# EAGLE board Line Board (EAGLE 9.3.2)
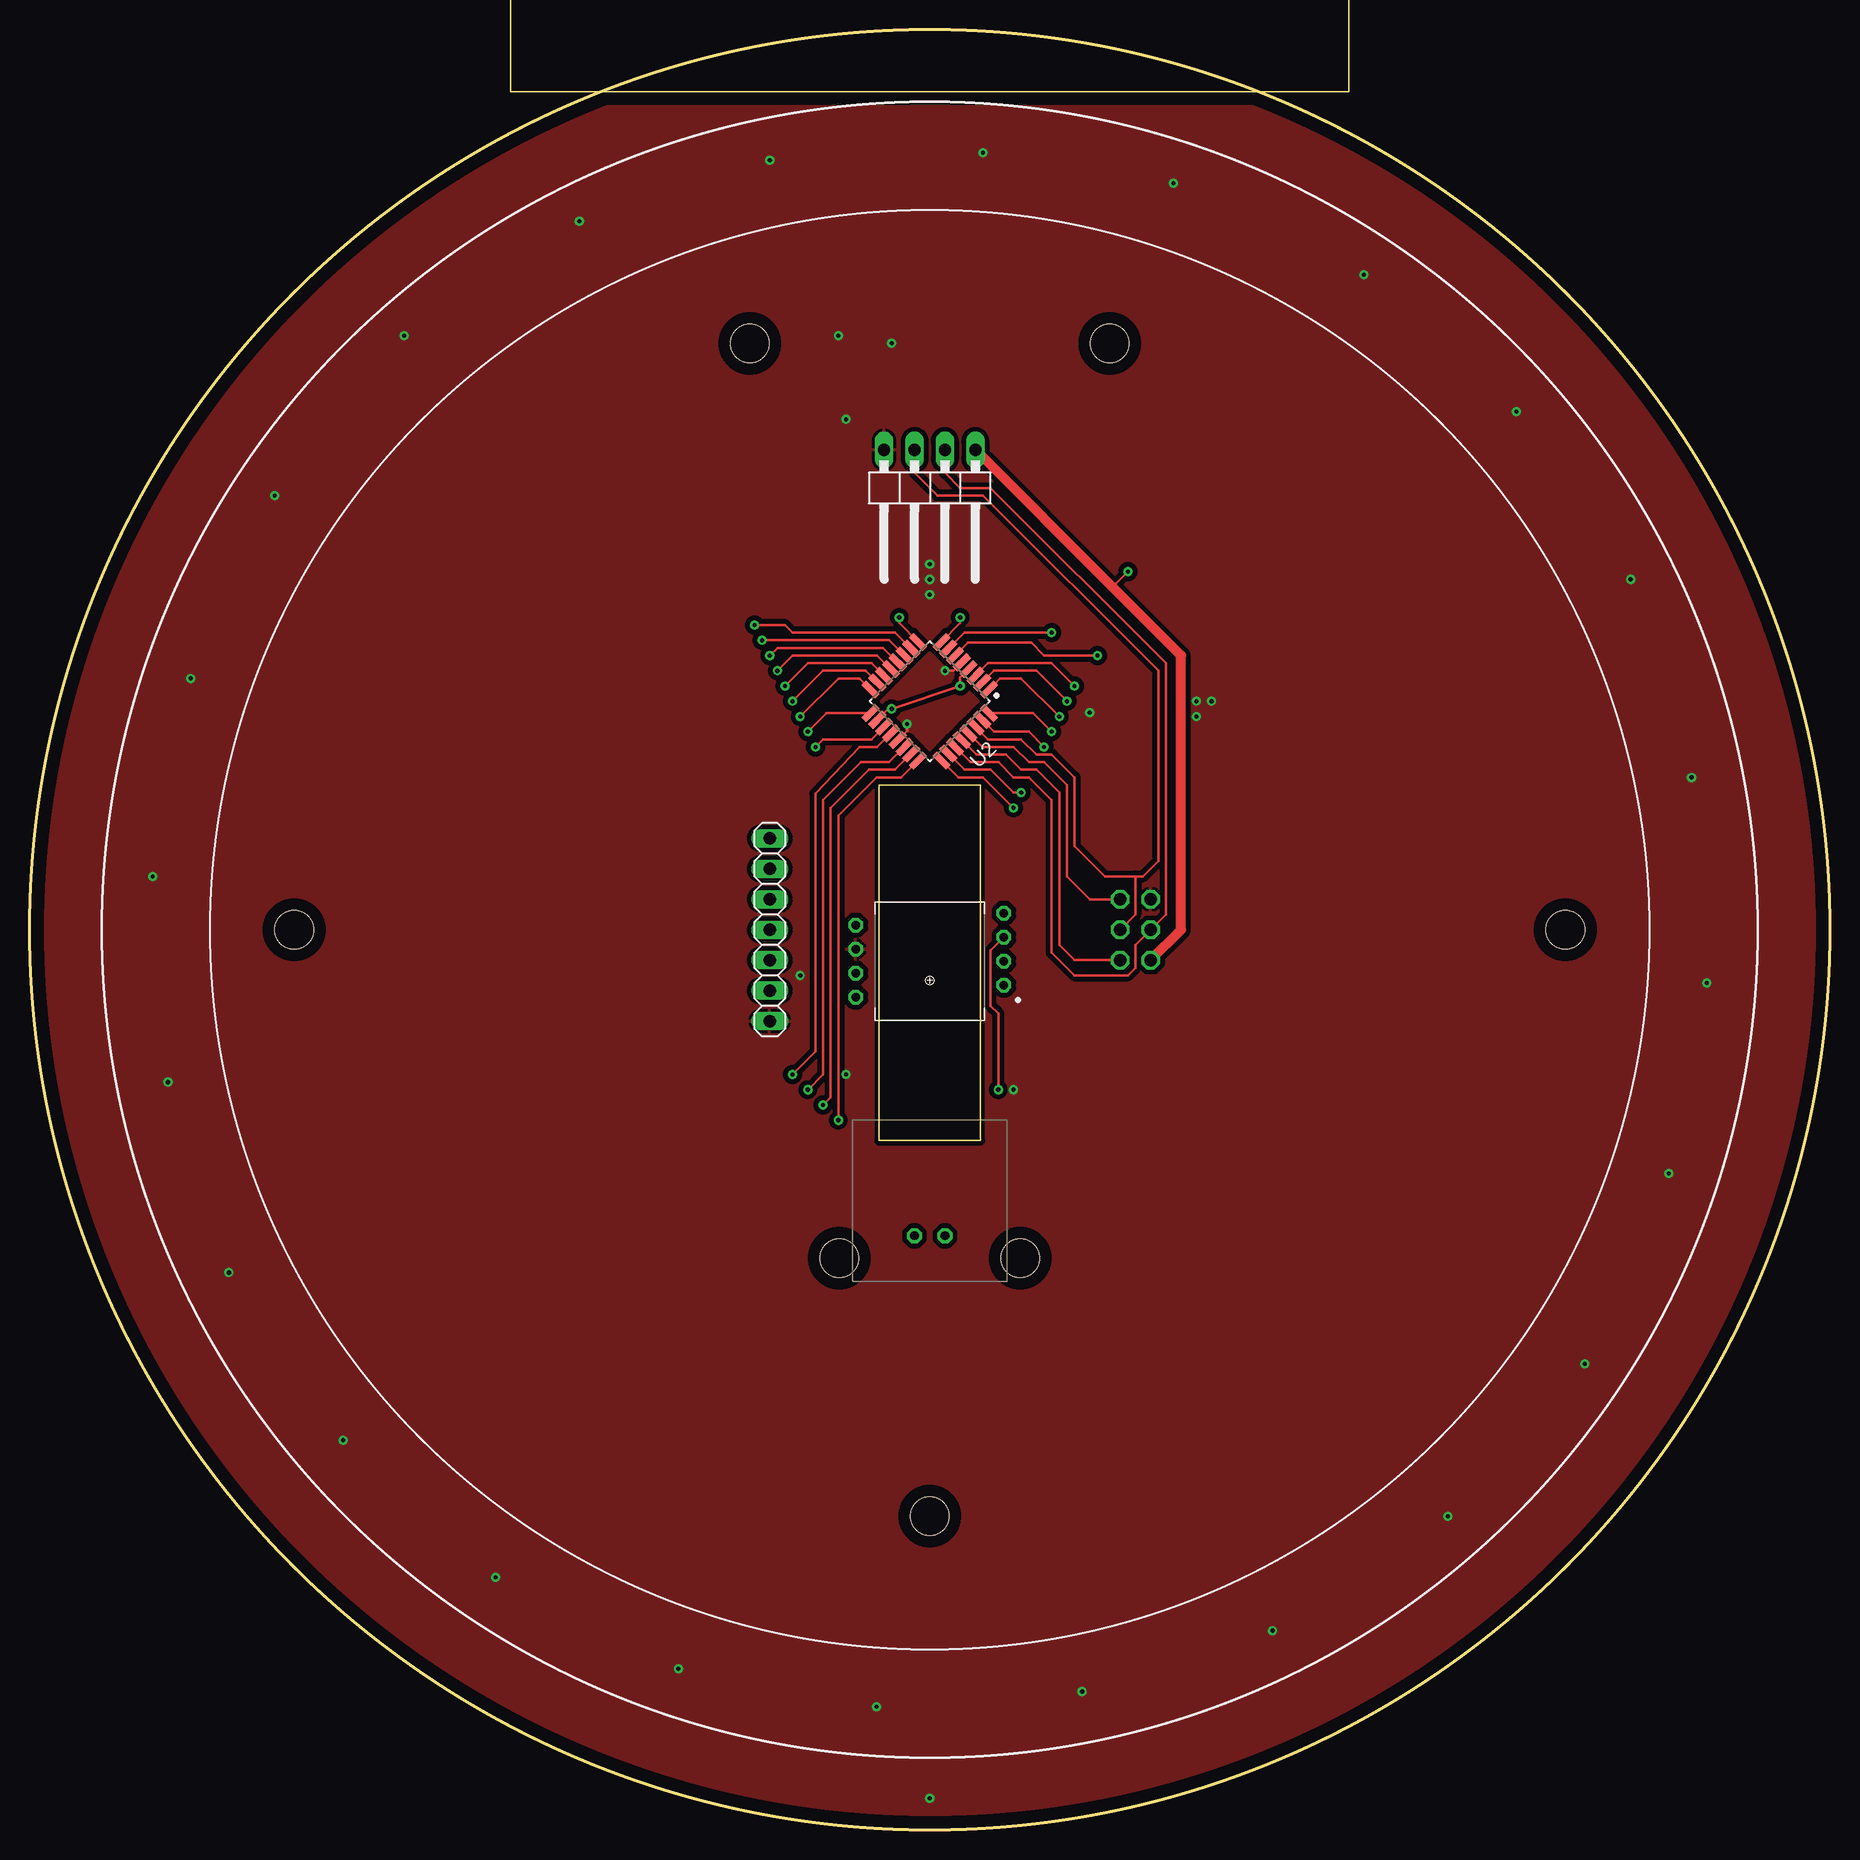
[diagram p0: board, top side]
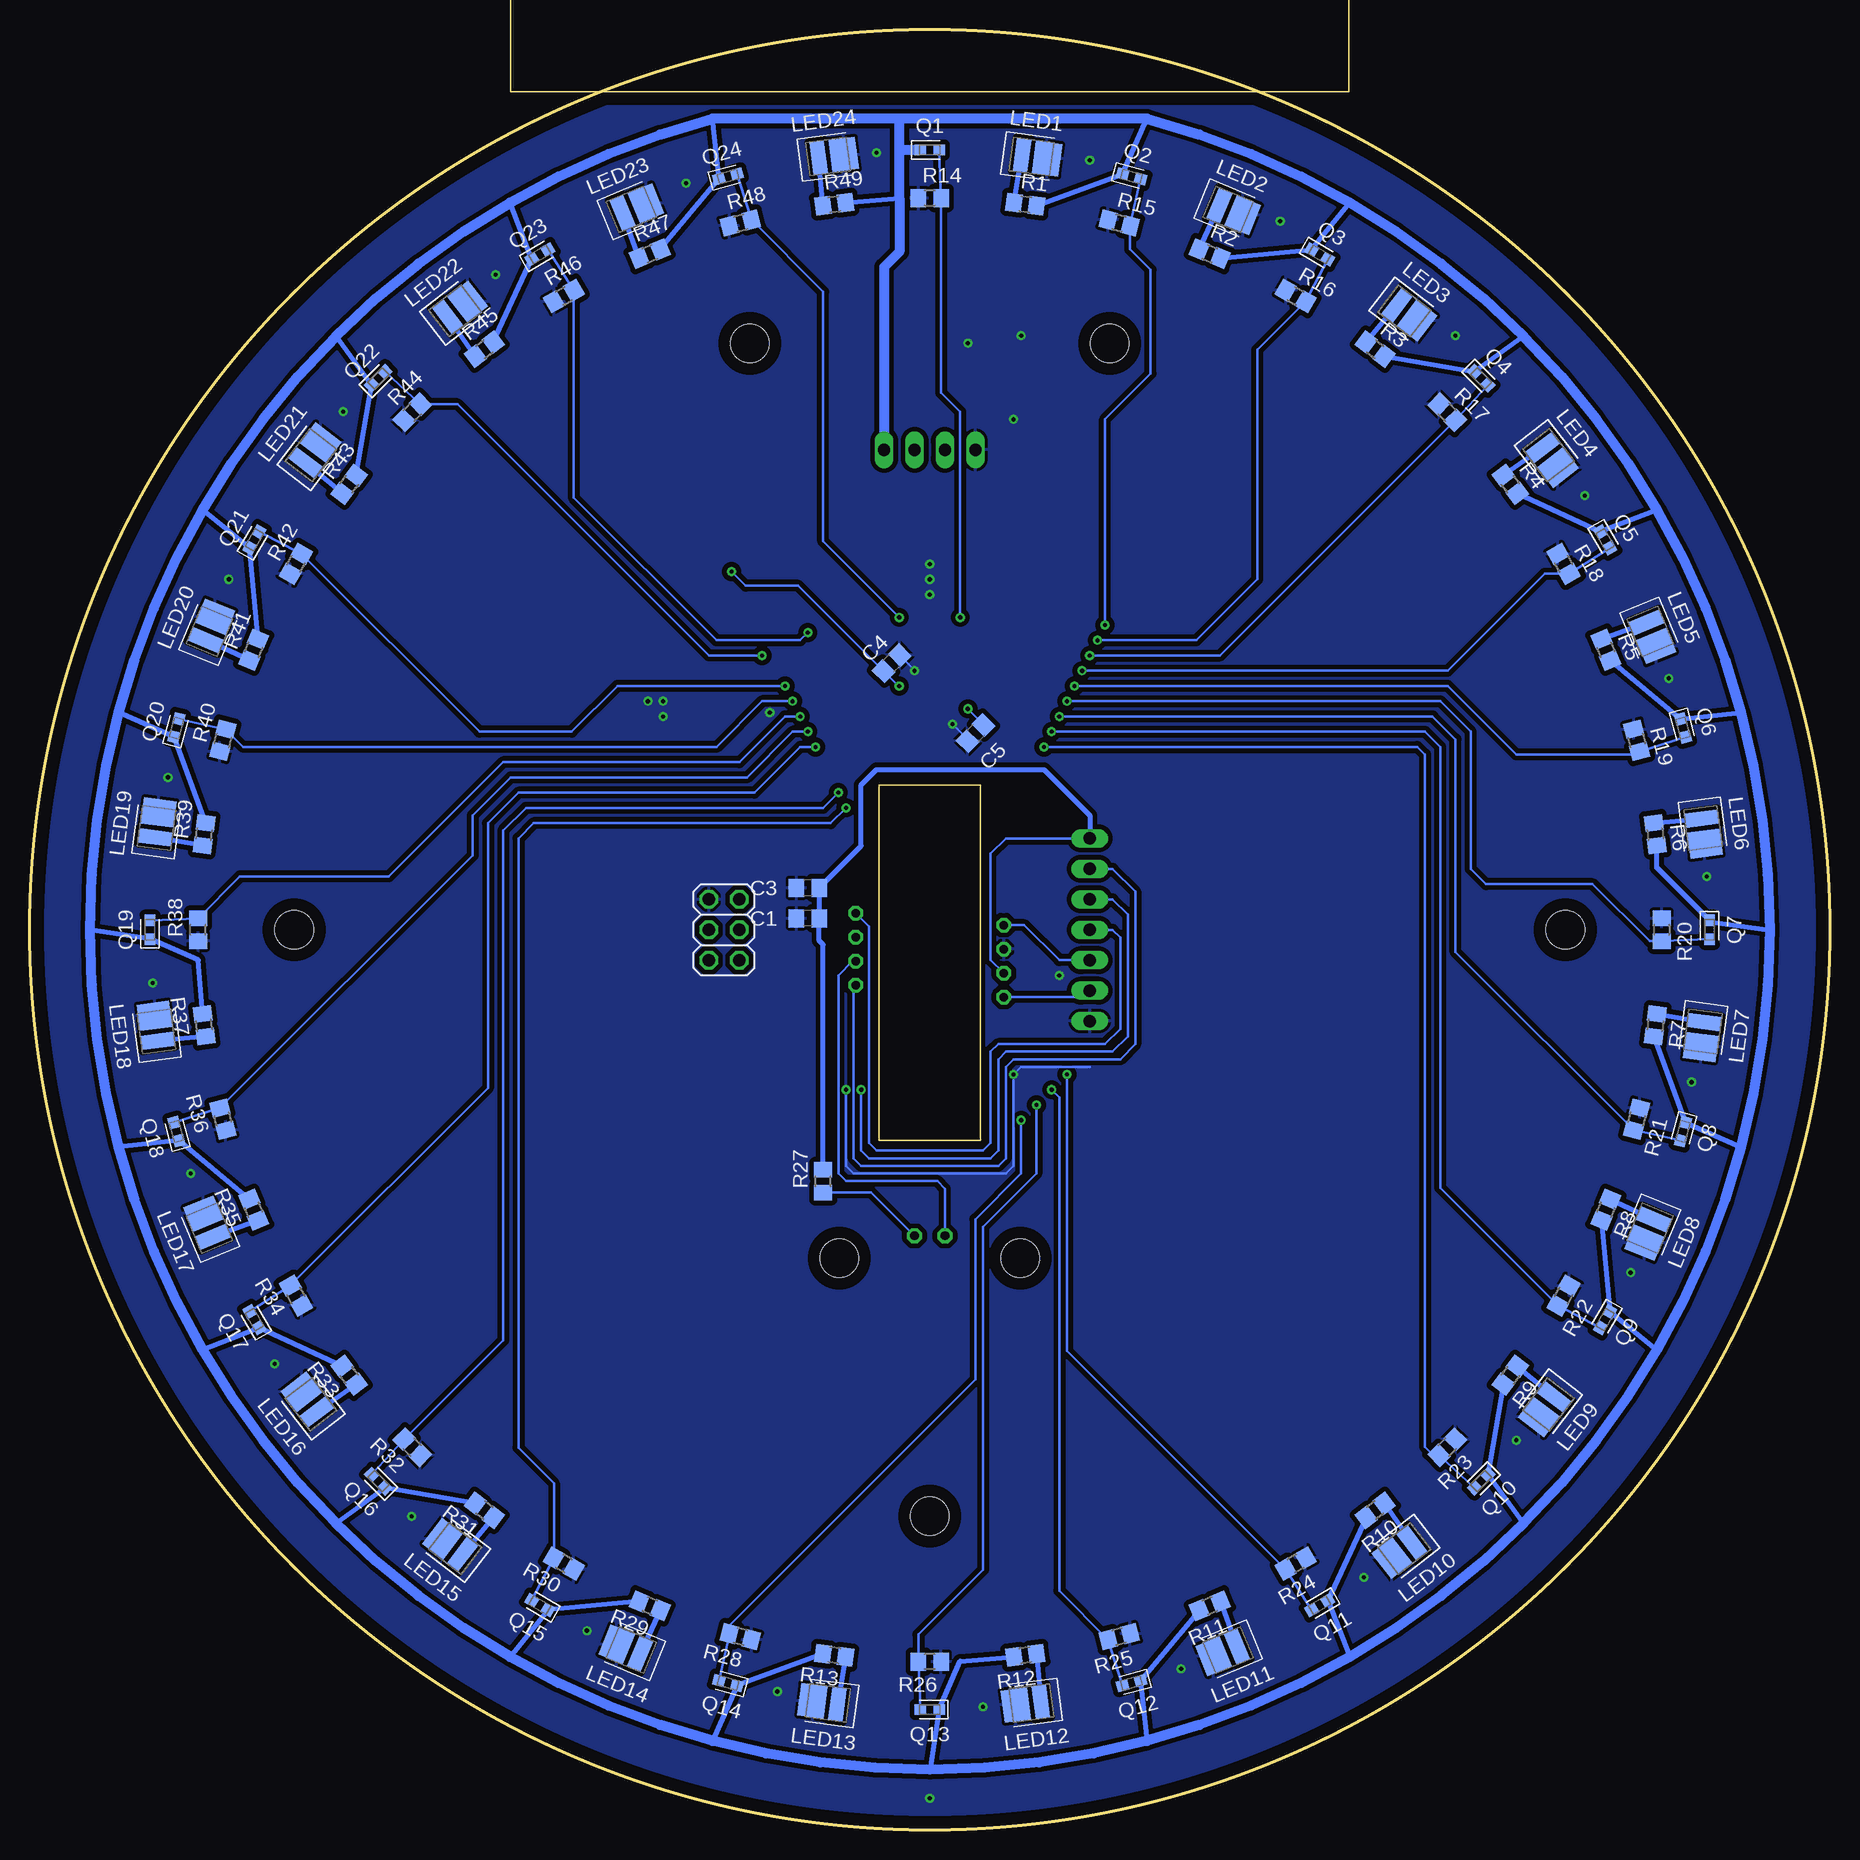
[diagram p1: board, bottom side, seen from below]

Size 150 x 150 mm. Coordinates in mm from the lower left corner, seen from the top.
Outline: circle at 75,75 radius 75
Copper layers (1*16): Top 0.035mm / dielectric 1.5mm / Bottom 0.035mm
Design rules "default *": minimum track width 8mil, minimum drill 0.35mm, track to track 6mil, track to pad 6mil, pad to pad 6mil, via to via 6mil, smd to smd 6mil, copper to edge 40mil, drill to drill 6mil, minimum pad ring 10mil, minimum via ring 8mil, stop-mask expansion 4mil, vias tented up to drill 15mil, thermal gap 10mil
Net classes: 0 default: width 0.203 mm
Holes 3.2 mm at 22.02,75 90,123.88 127.98,75 75,26.12 60,123.88

## Footprints (pad centres in the part's own frame; a part is rotated, then mirrored left to right if it is on the bottom)
C0805 = smd 1.3 x 1.5: 1 -0.95,0; 2 0.95,0
2X03 = drill 1.016 octagon: 1 -2.54,-1.27; 2 -2.54,1.27; 3 0,-1.27; 4 0,1.27; 5 2.54,-1.27; 6 2.54,1.27
1X04/90 = drill 1.016 long: 1 -3.81,-3.81; 2 -1.27,-3.81; 3 1.27,-3.81; 4 3.81,-3.81
1X07 = drill 1.016 long: 1 -7.62,0; 2 -5.08,0; 3 -2.54,0; 4 0,0; 5 2.54,0; 6 5.08,0; 7 7.62,0
LEDC3428X70 = smd 1.2 x 2.7: 1 -0.785,0 | smd 2.2 x 2.7: 2 1.315,0
LEDC1708X60 = smd 0.962 x 0.912: C -0.775,0; E 0.775,0
R0805 = smd 1.3 x 1.5: 1 -0.95,0; 2 0.95,0
QFP80P900X900X120-32 = smd 1.6 x 0.547: 1 -4.181,2.8; 2 -4.181,2; 3 -4.181,1.2; 4 -4.181,0.4; 5 -4.181,-0.4; 6 -4.181,-1.2; 7 -4.181,-2; 8 -4.181,-2.8; 17 4.181,-2.8; 18 4.181,-2; 19 4.181,-1.2; 20 4.181,-0.4; 21 4.181,0.4; 22 4.181,1.2; 23 4.181,2; 24 4.181,2.8 | smd 0.547 x 1.6: 9 -2.8,-4.181; 10 -2,-4.181; 11 -1.2,-4.181; 12 -0.4,-4.181; 13 0.4,-4.181; 14 1.2,-4.181; 15 2,-4.181; 16 2.8,-4.181; 25 2.8,4.181; 26 2,4.181; 27 1.2,4.181; 28 0.4,4.181; 29 -0.4,4.181; 30 -1.2,4.181; 31 -2,4.181; 32 -2.8,4.181
ADNS3050 = drill 0.711 octagon: 1 6.172,-3.25; 2 6.172,-1.25; 3 6.172,0.75; 4 6.172,2.75; 5 -6.172,1.75; 6 -6.172,-0.25; 7 -6.172,-2.25; 8 -6.172,-4.25; A 1.27,-24.15; K -1.27,-24.15 | hole 3.2: -7.544,-26.01; 7.544,-26.01

## Placement (x,y rotation side)
C1  0.1uF  [C0805]  85.16,75.95 180 bottom
C3  1uF  [C0805]  85.16,78.49 180 bottom
C4  0.1uF  [C0805]  78.17,97.22 45 bottom
C5  0.1uF  [C0805]  71.19,91.38 225 bottom
JP1  [2X03]  92.14,75 90 bottom
JP2  [1X04/90]  75,111.19 180 top
JP4  [1X07]  61.66,75 270 top
LED1  STW8A12D_LED  [LEDC3428X70]  66.52,139.44 352.5 bottom
LED2  STW8A12D_LED  [LEDC3428X70]  50.13,135.05 337.5 bottom
LED3  STW8A12D_LED  [LEDC3428X70]  35.43,126.57 322.5 bottom
LED4  STW8A12D_LED  [LEDC3428X70]  23.43,114.57 307.5 bottom
LED5  STW8A12D_LED  [LEDC3428X70]  14.95,99.87 292.5 bottom
LED6  STW8A12D_LED  [LEDC3428X70]  10.56,83.48 277.5 bottom
LED7  STW8A12D_LED  [LEDC3428X70]  10.56,66.52 262.5 bottom
LED8  STW8A12D_LED  [LEDC3428X70]  14.95,50.13 247.5 bottom
LED9  STW8A12D_LED  [LEDC3428X70]  23.43,35.43 232.5 bottom
LED10  STW8A12D_LED  [LEDC3428X70]  35.43,23.43 217.5 bottom
LED11  STW8A12D_LED  [LEDC3428X70]  50.13,14.95 202.5 bottom
LED12  STW8A12D_LED  [LEDC3428X70]  66.52,10.56 187.5 bottom
LED13  STW8A12D_LED  [LEDC3428X70]  83.48,10.56 172.5 bottom
LED14  STW8A12D_LED  [LEDC3428X70]  99.87,14.95 157.5 bottom
LED15  STW8A12D_LED  [LEDC3428X70]  114.57,23.43 142.5 bottom
LED16  STW8A12D_LED  [LEDC3428X70]  126.57,35.43 127.5 bottom
LED17  STW8A12D_LED  [LEDC3428X70]  135.05,50.13 112.5 bottom
LED18  STW8A12D_LED  [LEDC3428X70]  139.44,66.52 97.5 bottom
LED19  STW8A12D_LED  [LEDC3428X70]  139.44,83.48 82.5 bottom
LED20  STW8A12D_LED  [LEDC3428X70]  135.05,99.87 67.5 bottom
LED21  STW8A12D_LED  [LEDC3428X70]  126.57,114.57 52.5 bottom
LED22  STW8A12D_LED  [LEDC3428X70]  114.57,126.57 37.5 bottom
LED23  STW8A12D_LED  [LEDC3428X70]  99.87,135.05 22.5 bottom
LED24  STW8A12D_LED  [LEDC3428X70]  83.48,139.44 7.5 bottom
Q1  ALS-PT19-315C/L177/TR8  [LEDC1708X60]  75,140 0 bottom
Q2  ALS-PT19-315C/L177/TR8  [LEDC1708X60]  58.18,137.78 345 bottom
Q3  ALS-PT19-315C/L177/TR8  [LEDC1708X60]  42.5,131.29 330 bottom
Q4  ALS-PT19-315C/L177/TR8  [LEDC1708X60]  29.04,120.96 315 bottom
Q5  ALS-PT19-315C/L177/TR8  [LEDC1708X60]  18.71,107.5 300 bottom
Q6  ALS-PT19-315C/L177/TR8  [LEDC1708X60]  12.22,91.82 285 bottom
Q7  ALS-PT19-315C/L177/TR8  [LEDC1708X60]  10,75 270 bottom
Q8  ALS-PT19-315C/L177/TR8  [LEDC1708X60]  12.22,58.18 255 bottom
Q9  ALS-PT19-315C/L177/TR8  [LEDC1708X60]  18.71,42.5 240 bottom
Q10  ALS-PT19-315C/L177/TR8  [LEDC1708X60]  29.04,29.04 225 bottom
Q11  ALS-PT19-315C/L177/TR8  [LEDC1708X60]  42.5,18.71 210 bottom
Q12  ALS-PT19-315C/L177/TR8  [LEDC1708X60]  58.18,12.22 195 bottom
Q13  ALS-PT19-315C/L177/TR8  [LEDC1708X60]  75,10 180 bottom
Q14  ALS-PT19-315C/L177/TR8  [LEDC1708X60]  91.82,12.22 165 bottom
Q15  ALS-PT19-315C/L177/TR8  [LEDC1708X60]  107.5,18.71 150 bottom
Q16  ALS-PT19-315C/L177/TR8  [LEDC1708X60]  120.96,29.04 135 bottom
Q17  ALS-PT19-315C/L177/TR8  [LEDC1708X60]  131.29,42.5 120 bottom
Q18  ALS-PT19-315C/L177/TR8  [LEDC1708X60]  137.78,58.18 105 bottom
Q19  ALS-PT19-315C/L177/TR8  [LEDC1708X60]  140,75 90 bottom
Q20  ALS-PT19-315C/L177/TR8  [LEDC1708X60]  137.78,91.82 75 bottom
Q21  ALS-PT19-315C/L177/TR8  [LEDC1708X60]  131.29,107.5 60 bottom
Q22  ALS-PT19-315C/L177/TR8  [LEDC1708X60]  120.96,120.96 45 bottom
Q23  ALS-PT19-315C/L177/TR8  [LEDC1708X60]  107.5,131.29 30 bottom
Q24  ALS-PT19-315C/L177/TR8  [LEDC1708X60]  91.82,137.78 15 bottom
R1  390R  [R0805]  67.04,135.48 352.5 bottom
R2  390R  [R0805]  51.66,131.36 337.5 bottom
R3  390R  [R0805]  37.87,123.4 322.5 bottom
R4  390R  [R0805]  26.6,112.13 307.5 bottom
R5  390R  [R0805]  18.64,98.34 292.5 bottom
R6  390R  [R0805]  14.52,82.96 277.5 bottom
R7  390R  [R0805]  14.52,67.04 262.5 bottom
R8  390R  [R0805]  18.64,51.66 247.5 bottom
R9  390R  [R0805]  26.6,37.87 232.5 bottom
R10  390R  [R0805]  37.87,26.6 217.5 bottom
R11  390R  [R0805]  51.66,18.64 202.5 bottom
R12  390R  [R0805]  67.04,14.52 187.5 bottom
R13  390R  [R0805]  82.96,14.52 172.5 bottom
R14  10k  [R0805]  75,136 0 bottom
R15  10k  [R0805]  59.21,133.92 345 bottom
R16  10k  [R0805]  44.5,127.83 330 bottom
R17  10k  [R0805]  31.87,118.13 315 bottom
R18  10k  [R0805]  22.17,105.5 300 bottom
R19  10k  [R0805]  16.08,90.79 285 bottom
R20  10k  [R0805]  14,75 270 bottom
R21  10k  [R0805]  16.08,59.21 255 bottom
R22  10k  [R0805]  22.17,44.5 240 bottom
R23  10k  [R0805]  31.87,31.87 225 bottom
R24  10k  [R0805]  44.5,22.17 210 bottom
R25  10k  [R0805]  59.21,16.08 195 bottom
R26  10k  [R0805]  75,14 180 bottom
R27  33R  [R0805]  83.89,54.05 90 bottom
R28  10k  [R0805]  90.79,16.08 165 bottom
R29  390R  [R0805]  98.34,18.64 157.5 bottom
R30  10k  [R0805]  105.5,22.17 150 bottom
R31  390R  [R0805]  112.13,26.6 142.5 bottom
R32  10k  [R0805]  118.13,31.87 135 bottom
R33  390R  [R0805]  123.4,37.87 127.5 bottom
R34  10k  [R0805]  127.83,44.5 120 bottom
R35  390R  [R0805]  131.36,51.66 112.5 bottom
R36  10k  [R0805]  133.92,59.21 105 bottom
R37  390R  [R0805]  135.48,67.04 97.5 bottom
R38  10k  [R0805]  136,75 90 bottom
R39  390R  [R0805]  135.48,82.96 82.5 bottom
R40  10k  [R0805]  133.92,90.79 75 bottom
R41  390R  [R0805]  131.36,98.34 67.5 bottom
R42  10k  [R0805]  127.83,105.5 60 bottom
R43  390R  [R0805]  123.4,112.13 52.5 bottom
R44  10k  [R0805]  118.13,118.13 45 bottom
R45  390R  [R0805]  112.13,123.4 37.5 bottom
R46  10k  [R0805]  105.5,127.83 30 bottom
R47  390R  [R0805]  98.34,131.36 22.5 bottom
R48  10k  [R0805]  90.79,133.92 15 bottom
R49  390R  [R0805]  82.96,135.48 7.5 bottom
U2  ATTINY828  [QFP80P900X900X120-32]  75,94.05 225 top
U3  ADNS3050  [ADNS3050]  75,73.63 0 top
U$1  [COLORBOARDCUTOUT]  75,75 0 top

## Library data of the parts
C1 C3-C5 = rcl; SPICEPREFIX: C
JP1 JP2 JP4 = pinhead
LED1-LED24 Q1-Q24 U2 U3 U$1 = Robocup2019
R1-R49 = rcl; SPICEPREFIX: R

## Nets
+3V3: C1.1 C3.1 JP4.1 R27.2 U3.7
+5V: C4.1 C5.1 JP1.2 JP2.1 Q1.C Q2.C Q3.C Q4.C Q5.C Q6.C Q7.C Q8.C Q9.C Q10.C Q11.C Q12.C Q13.C Q14.C Q15.C Q16.C Q17.C Q18.C Q19.C Q20.C Q21.C Q22.C Q23.C Q24.C R1.2 R2.2 R3.2 R4.2 R5.2 R6.2 R7.2 R8.2 R9.2 R10.2 R11.2 R12.2 R13.2 R29.2 R31.2 R33.2 R35.2 R37.2 R39.2 R41.2 R43.2 R45.2 R47.2 R49.2 U2.4 U2.18
COLORSENSOR1: Q1.E R14.2 U2.9
COLORSENSOR2: Q2.E R15.2 U2.10
COLORSENSOR3: Q3.E R16.2 U2.11
COLORSENSOR4: Q4.E R17.2 U2.12
COLORSENSOR5: Q5.E R18.2 U2.13
COLORSENSOR6: Q6.E R19.2 U2.14
COLORSENSOR7: Q7.E R20.2 U2.15
COLORSENSOR8: Q8.E R21.2 U2.16
COLORSENSOR9: Q9.E R22.2 U2.17
COLORSENSOR10: Q10.E R23.2 U2.19
COLORSENSOR11: Q11.E R24.2 U2.20
COLORSENSOR12: Q12.E R25.2 U2.22
COLORSENSOR13: Q13.E R26.2 U2.23
COLORSENSOR14: Q14.E R28.2 U2.24
COLORSENSOR15: Q15.E R30.2 U2.25
COLORSENSOR16: Q16.E R32.2 U2.26
COLORSENSOR17: Q17.E R34.2 U2.31
COLORSENSOR18: Q18.E R36.2 U2.32
COLORSENSOR19: Q19.E R38.2 U2.1
COLORSENSOR20: Q20.E R40.2 U2.2
COLORSENSOR21: Q21.E R42.2 U2.3
COLORSENSOR22: Q22.E R44.2 U2.6
COLORSENSOR23: Q23.E R46.2 U2.7
COLORSENSOR24: Q24.E R48.2 U2.8
GND: C1.2 C3.2 C4.2 C5.2 JP1.6 JP2.4 JP4.7 LED1.2 LED2.2 LED3.2 LED4.2 LED5.2 LED6.2 LED7.2 LED8.2 LED9.2 LED10.2 LED11.2 LED12.2 LED13.2 LED14.2 LED15.2 LED16.2 LED17.2 LED18.2 LED19.2 LED20.2 LED21.2 LED22.2 LED23.2 LED24.2 R14.1 R15.1 R16.1 R17.1 R18.1 R19.1 R20.1 R21.1 R22.1 R23.1 R24.1 R25.1 R26.1 R28.1 R30.1 R32.1 R34.1 R36.1 R38.1 R40.1 R42.1 R44.1 R46.1 R48.1 U2.5 U2.21 U3.6
MISO: JP1.1 U2.28
MOSI/SDA: JP1.4 JP2.2 U2.27
MOUSECS: JP4.4 U3.4
MOUSEMISO: JP4.2 U3.1
MOUSEMOSI: JP4.3 U3.3
MOUSEMOTION: JP4.6 U3.8
MOUSESCK: JP4.5 U3.5
N$1: LED1.1 R1.1
N$2: U3.2 U3.K
N$3: R27.1 U3.A
N$6: LED2.1 R2.1
N$8: LED3.1 R3.1
N$9: LED4.1 R4.1
N$10: LED5.1 R5.1
N$11: LED6.1 R6.1
N$12: LED7.1 R7.1
N$13: LED8.1 R8.1
N$14: LED9.1 R9.1
N$15: LED10.1 R10.1
N$16: LED11.1 R11.1
N$17: LED12.1 R12.1
N$18: LED13.1 R13.1
N$19: LED14.1 R29.1
N$20: LED15.1 R31.1
N$21: LED16.1 R33.1
N$22: LED17.1 R35.1
N$23: LED18.1 R37.1
N$24: LED19.1 R39.1
N$25: LED20.1 R41.1
N$26: LED21.1 R43.1
N$27: LED22.1 R45.1
N$28: LED23.1 R47.1
N$29: LED24.1 R49.1
RST: JP1.5 U2.29
SCK/SCL: JP1.3 JP2.3 U2.30

## Tracks (layer width: path | path; a pad name or v marks a point on that pad's centre or on a via)
+3V3
  Bottom 0.203: U3.7 69.92,72.47 69.92,81.35 68.65,82.62 JP4.1
  Bottom 0.406: R27.2 83.89,73.77 84.21,74.08 C1.1 C3.1 80.72,81.99 80.72,87.06 79.44,88.34 65.47,88.34 61.66,84.53 JP4.1
+5V  (via drill 0.35)
  Top 0.203: U2.4 77.54,96.02 v77.54,95.32 v71.83,93.41 71.54,93.41 U2.18 | v91.51,104.84 90.24,103.58
  Top 0.813: JP1.2 95.95,75 95.95,97.86 90.24,103.58 JP2.1
  Bottom 0.203: v77.54,95.32 77.61,95.32 C4.1 85.97,103.68 90.35,103.68 v91.51,104.84 | v71.83,93.41 70.52,92.11 C5.1
  Bottom 0.406: R12.2 72.46,14.04 Q13.C 75,5 | R37.2 135.96,72.46 Q19.C 145,75 | R49.2 77.54,135.96 | R1.2 Q2.C 56.88,142.62 | R2.2 Q3.C 40,135.62 | R3.2 Q4.C 25.5,124.5 | R4.2 Q5.C 14.38,110 | R5.2 Q6.C 7.39,93.12 | R7.2 Q8.C 7.39,56.88 | R8.2 Q9.C 14.38,40 | R9.2 Q10.C 25.5,25.5 | R10.2 Q11.C 40,14.38 | R11.2 Q12.C 56.88,7.39 | R13.2 Q14.C 93.12,7.39 | R29.2 Q15.C 110,14.38 | R31.2 Q16.C 124.5,25.5 | R33.2 Q17.C 135.62,40 | R35.2 Q18.C 142.62,56.88 | R39.2 Q20.C 142.62,93.12 | R41.2 Q21.C 135.62,110 | R43.2 Q22.C 124.5,124.5 | R45.2 Q23.C 110,135.62 | R47.2 Q24.C 93.12,142.62 | R6.2 14.4,80.17 Q7.C 9.86,75.64 5,75
  Bottom 0.813: 77.54,142.62 56.88,142.62 arc15 40,135.62 arc15 25.5,124.5 arc15 14.38,110 arc15 7.39,93.12 arc15 5,75 arc15 7.39,56.88 arc15 14.38,40 arc15 25.5,25.5 arc15 40,14.38 arc15 56.88,7.39 arc15 75,5 arc15 93.12,7.39 arc15 110,14.38 arc15 124.5,25.5 arc15 135.62,40 arc15 142.62,56.88 arc15 145,75 arc15 142.62,93.12 arc15 135.62,110 arc15 124.5,124.5 arc15 110,135.62 arc15 93.12,142.62 77.54,142.62 | 77.54,139.77 77.54,135.96 77.54,131.51 78.81,130.25 JP2.1 | 77.54,139.77 77.54,142.62 | Q1.C 77.31,140 77.54,139.77
COLORSENSOR1  (via drill 0.35)
  Top 0.203: v72.46,101.03 72.46,100.55 U2.9
  Bottom 0.203: Q1.E R14.2 74.05,119.77 72.46,118.18 v72.46,101.03
COLORSENSOR2  (via drill 0.35)
  Top 0.203: U2.10 72.11,99.77 63.57,99.77 62.94,100.4 v60.39,100.4
  Bottom 0.203: Q2.E R15.2 58.29,131.71 56.59,130 56.59,121.35 60.39,117.55 v60.39,100.4
COLORSENSOR3  (via drill 0.35)
  Top 0.203: U2.11 71.62,99.13 v61.03,99.13
  Bottom 0.203: Q3.E R16.2 47.7,123.34 47.7,104.21 52.77,99.13 v61.03,99.13
COLORSENSOR4  (via drill 0.35)
  Top 0.203: U2.12 71.12,98.5 63.57,98.5 62.3,98.5 v61.66,97.86
  Bottom 0.203: Q4.E R17.2 50.8,97.86 v61.66,97.86
COLORSENSOR5  (via drill 0.35)
  Top 0.203: U2.13 70.62,97.86 63.57,97.86 v62.3,96.59
  Bottom 0.203: Q5.E R18.2 23.73,104.68 31.82,96.59 v62.3,96.59
COLORSENSOR6  (via drill 0.35)
  Top 0.203: U2.14 70.13,97.22 64.84,97.22 v62.94,95.32
  Bottom 0.203: Q6.E R19.2 16.1,89.61 26.1,89.61 31.82,95.32 v62.94,95.32
COLORSENSOR7  (via drill 0.35)
  Top 0.203: U2.15 69.63,96.59 66.11,96.59 v63.57,94.05
  Bottom 0.203: Q7.E R20.2 14.99,74.05 19.76,78.81 28.65,78.81 29.91,80.08 29.91,91.51 32.45,94.05 v63.57,94.05
COLORSENSOR8  (via drill 0.35)
  Top 0.203: U2.16 69.14,95.95 67.38,95.95 v64.2,92.78
  Bottom 0.203: Q8.E R21.2 31.19,73.15 31.19,90.88 33.09,92.78 v64.2,92.78
COLORSENSOR9  (via drill 0.35)
  Top 0.203: U2.17 66.4,93.07 v64.84,91.51
  Bottom 0.203: Q9.E R22.2 32.45,53.48 32.45,90.24 33.73,91.51 v64.84,91.51
COLORSENSOR10  (via drill 0.35)
  Top 0.203: v65.47,90.24 66.11,90.88 70.13,90.88 U2.19
  Bottom 0.203: Q10.E R23.2 33.01,31.19 33.73,31.91 33.73,89.61 34.36,90.24 v65.47,90.24
COLORSENSOR11  (via drill 0.35)
  Top 0.203: U2.20 70.62,90.24 69.14,90.24 65.47,86.35 65.47,64.84 v63.57,62.94
  Bottom 0.203: R24.2 45.26,21.59 | 45.26,21.59 Q11.E | v63.57,62.94 63.57,39.91 45.26,21.59
COLORSENSOR12  (via drill 0.35)
  Top 0.203: U2.22 71.62,88.97 69.28,88.97 66.11,85.8 66.11,62.94 v64.84,61.66
  Bottom 0.203: Q12.E R25.2 64.2,19.91 64.2,61.03 v64.84,61.66
COLORSENSOR13  (via drill 0.35)
  Top 0.203: U2.23 72.11,88.34 69.92,88.34 66.75,85.16 66.75,61.03 v66.11,60.39
  Bottom 0.203: Q13.E R26.2 75.95,16.27 70.56,21.66 70.56,50.23 66.11,54.68 v66.11,60.39
COLORSENSOR14  (via drill 0.35)
  Top 0.203: U2.24 72.61,87.7 70.56,87.7 67.38,84.53 v67.38,59.12
  Bottom 0.203: v67.38,59.12 67.38,54.68 71.19,50.87 71.19,37.53 91.71,17.02 R28.2 Q14.E
COLORSENSOR15  (via drill 0.35)
  Top 0.203: U2.25 77.39,87.7 79.44,87.7 v81.98,85.16
  Bottom 0.203: Q15.E R30.2 106.32,28.85 109.29,31.82 109.29,82.62 108.02,83.89 83.25,83.89 v81.98,85.16
COLORSENSOR16  (via drill 0.35)
  Top 0.203: U2.26 77.89,88.34 80.08,88.34 81.98,86.43 v82.62,86.43
  Bottom 0.203: Q16.E R32.2 110.56,40.78 110.56,83.25 108.66,85.16 108.02,85.16 83.89,85.16 v82.62,86.43
COLORSENSOR17  (via drill 0.35)
  Top 0.203: U2.31 80.37,91.51 83.25,91.51 v84.53,90.24
  Bottom 0.203: Q17.E 128.41,45.26 | 128.41,45.26 R34.2 | v84.53,90.24 85.8,90.24 89.61,86.43 109.29,86.43 111.83,83.89 111.83,61.83 128.41,45.26
COLORSENSOR18  (via drill 0.35)
  Top 0.203: v85.16,91.51 83.6,93.07 U2.32
  Bottom 0.203: Q18.E R36.2 113.1,81.2 113.1,84.53 109.92,87.7 90.24,87.7 86.43,91.51 v85.16,91.51
COLORSENSOR19  (via drill 0.35)
  Top 0.203: U2.1 80.86,95.95 82.62,95.95 v85.8,92.78
  Bottom 0.203: Q19.E R38.2 132.5,79.44 120.09,79.44 110.56,88.97 90.88,88.97 87.06,92.78 v85.8,92.78
COLORSENSOR20  (via drill 0.35)
  Top 0.203: U2.2 80.37,96.59 83.89,96.59 v86.43,94.05
  Bottom 0.203: Q20.E R40.2 132.21,90.24 92.78,90.24 88.97,94.05 v86.43,94.05
COLORSENSOR21  (via drill 0.35)
  Top 0.203: U2.3 79.87,97.22 85.16,97.22 v87.06,95.32
  Bottom 0.203: Q21.E R42.2 112.54,91.51 104.84,91.51 101.03,95.32 v87.06,95.32
COLORSENSOR22  (via drill 0.35)
  Top 0.203: U2.6 78.17,98.92 83.46,98.92 84.53,97.86 v88.97,97.86
  Bottom 0.203: Q22.E R44.2 114.36,118.81 93.41,97.86 v88.97,97.86
COLORSENSOR23  (via drill 0.35)
  Top 0.203: v85.16,99.77 77.89,99.77 U2.7
  Bottom 0.203: Q23.E R46.2 104.68,111.03 92.78,99.13 85.8,99.13 v85.16,99.77
COLORSENSOR24  (via drill 0.35)
  Top 0.203: U2.8 77.54,100.55 v77.54,101.03
  Bottom 0.203: Q24.E R48.2 83.89,128.19 83.89,107.38 v77.54,101.03
GND  (via drill 0.35)
  Top 0.203: U2.5 76.97,96.59 v76.27,96.59 | U2.21 73.09,91.58 v73.09,92.14
  Bottom 0.203: v76.27,96.59 76.27,96.66 C4.2 | v73.09,92.14 71.86,90.91 C5.2 | v81.98,61.66 81.98,55.31 81.35,54.68 68.65,54.68 68.02,55.31 v68.02,62.94 67.38,63.57 61.66,63.57
  other vias: 45.79,134.06 31.19,124.53 20.39,111.19 13.41,95.95 10.23,79.44 11.5,62.3 16.58,46.42 26.1,32.45 38.8,21.02 54.05,13.41 70.56,10.23 87.7,11.5 103.58,16.58 118.18,26.1 129.61,38.8 136.59,54.68 139.77,70.56 138.5,87.7 133.42,104.21 123.9,118.18 111.19,129.61 95.32,137.23 79.44,139.77 61.66,139.13 67.38,124.53 71.83,123.9 68.02,117.55 97.22,94.05 97.22,92.78 98.5,94.05 88.34,93.1 75,2.61 75,102.94 75,104.21 75,105.48 64.2,71.19
  pour Top (isolate 0.406): 149.93,75 arc-90 75,0.07 arc-90 0.07,75 arc-90 75,149.93 arc-90
  pour Bottom (isolate 0.406): 0.07,75 arc90 75,0.07 arc90 149.93,75 arc90 75,149.93 arc90
  cutout Top: 40.08,153.74 40.08,143.83 109.92,143.83 109.92,153.74
  cutout Bottom: 109.92,153.74 109.92,143.83 40.08,143.83 40.08,153.74
MISO
  Top 0.203: U2.28 78.88,89.61 81.35,89.61 82.62,88.34 83.89,88.34 85.8,86.43 85.8,73.73 87.06,72.46 JP1.1
MOSI/SDA
  Top 0.203: JP2.2 76.27,113.1 77.54,111.83 80.08,111.83 94.69,97.22 94.69,76.27 JP1.4 92.14,73.73 92.14,71.83 91.51,71.19 87.06,71.19 85.16,73.09 85.16,85.8 83.25,87.7 81.98,87.7 80.72,88.97 78.38,88.97 U2.27
MOUSECS
  Bottom 0.203: JP4.4 59.76,75 59.12,74.36 59.12,66.75 60.39,65.47 69.28,65.47 69.92,64.84 69.92,57.22 70.56,56.59 79.44,56.59 80.08,57.22 80.08,75.29 U3.4
MOUSEMISO
  Bottom 0.203: JP4.2 59.76,80.08 57.86,78.17 57.86,65.47 59.12,64.2 68.02,64.2 68.65,63.57 68.65,55.95 69.28,55.31 80.72,55.31 81.35,55.95 81.35,70.2 U3.1
MOUSEMOSI  (via drill 0.35)
  Top 0.203: v80.72,61.66 80.72,68.02 80.08,68.65 80.08,73.29 U3.3
  Bottom 0.203: JP4.3 59.76,77.54 58.49,76.27 58.49,66.11 59.76,64.84 68.65,64.84 69.28,64.2 69.28,56.59 69.92,55.95 80.08,55.95 80.72,56.59 80.72,60.39 v80.72,61.66
MOUSEMOTION
  Bottom 0.203: JP4.6 62.2,69.38 U3.8
MOUSESCK
  Bottom 0.203: U3.5 67.13,75.38 64.2,72.46 JP4.5
N$1
  Bottom 0.406: R1.1 LED1.1
N$2
  Bottom 0.203: U3.K 73.73,53.41 74.36,54.05 81.98,54.05 82.62,54.68 82.62,71.19 81.43,72.38 U3.2
N$3
  Bottom 0.203: U3.A 79.88,53.09 R27.1
N$6
  Bottom 0.406: R2.1 LED2.1
N$8
  Bottom 0.406: R3.1 LED3.1
N$9
  Bottom 0.406: R4.1 LED4.1
N$10
  Bottom 0.406: R5.1 LED5.1
N$11
  Bottom 0.406: R6.1 LED6.1
N$12
  Bottom 0.406: R7.1 LED7.1
N$13
  Bottom 0.406: R8.1 LED8.1
N$14
  Bottom 0.406: R9.1 LED9.1
N$15
  Bottom 0.406: R10.1 LED10.1
N$16
  Bottom 0.406: R11.1 LED11.1
N$17
  Bottom 0.406: R12.1 LED12.1
N$18
  Bottom 0.406: R13.1 LED13.1
N$19
  Bottom 0.406: R29.1 LED14.1
N$20
  Bottom 0.406: R31.1 LED15.1
N$21
  Bottom 0.406: R33.1 LED16.1
N$22
  Bottom 0.406: R35.1 LED17.1
N$23
  Bottom 0.406: R37.1 LED18.1
N$24
  Bottom 0.406: R39.1 LED19.1
N$25
  Bottom 0.406: R41.1 LED20.1
N$26
  Bottom 0.406: R43.1 LED21.1
N$27
  Bottom 0.406: R45.1 LED22.1
N$28
  Bottom 0.406: R47.1 LED23.1
N$29
  Bottom 0.406: R49.1 LED24.1
RST
  Top 0.203: U2.29 79.38,90.24 81.98,90.24 83.25,88.97 84.53,88.97 86.43,87.06 86.43,79.44 88.34,77.54 JP1.5
SCK/SCL
  Top 0.203: JP2.3 73.73,113.1 75.64,111.19 79.44,111.19 94.05,96.59 94.05,80.72 92.78,79.44 92.14,79.44 | U2.30 79.87,90.88 82.62,90.88 83.89,89.61 85.16,89.61 87.06,87.7 87.06,81.98 89.61,79.44 92.14,79.44 | JP1.3 92.14,76.27 92.14,79.44